# Altium PCB ratopus.PcbDoc (part 3 of 3)
Units mm, origin at the board's own origin, x right, y up, seen from the top; angles counter-clockwise.
Board outline 160 x 100 mm, 2 copper layers (Top Layer, Bottom Layer); 132 components, 69 nets, 422 pads, 0 vias.
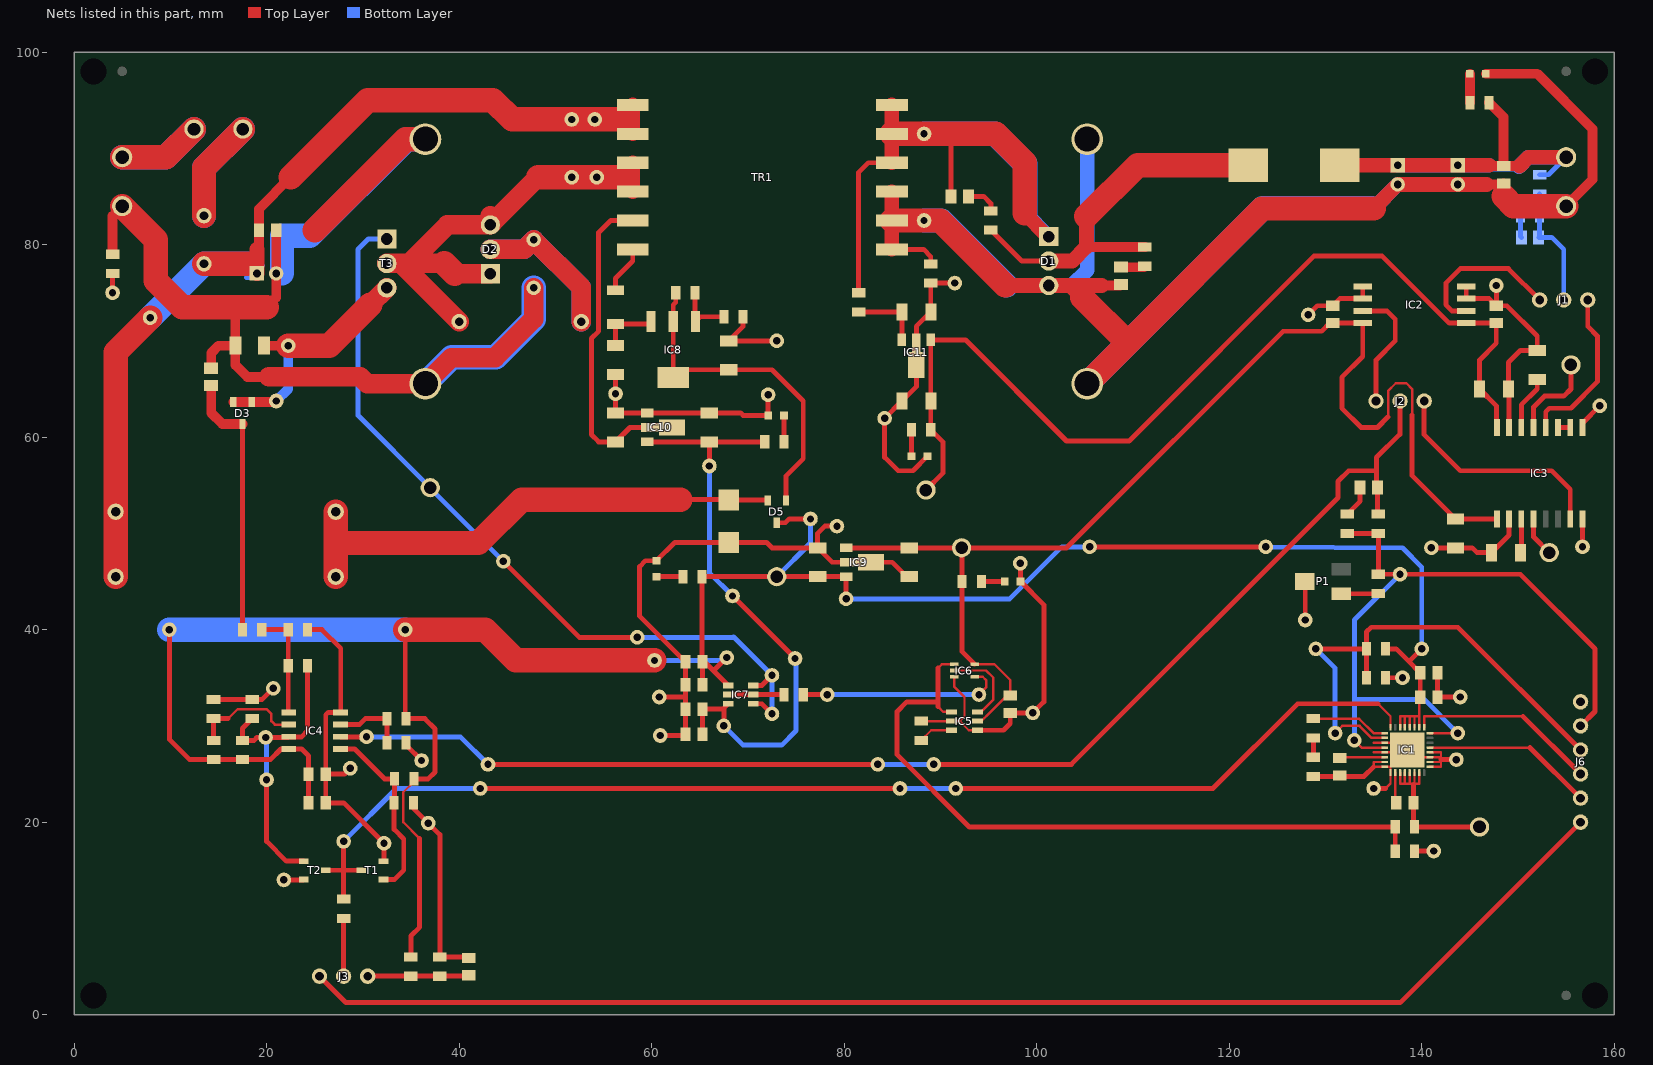
[diagram p2: the nets of this part, all layers, seen from the top]

## Part data (continued)
R39: library part R0805_1K_1%_0.125W_100PPM, "Resistor - 1%", Case=0805, Manufacturer=GENERIC, Manufacturer1 ComponentHeight=0.6mm, Manufacturer1 Example="NIC COMPONENT", Manufacturer1 Part Number=NRC10F1001TRF, Power=0.125W, Tolerance=±1%, Author="CERN DEM JLC", Component Type=Standard, CreateDate=03/12/2007, HelpURL=\\cern.ch\dfs\Applications\Altium\Datasheets\R0805_NIC_NRC.pdf, LatestRevisionDate=13/03/2008, Manufacturer Part Number=R0805_1K_1%_0.125W_100PPM, Mounted=Yes, Part Description="General Purpose Thick Film Chip Resistor", Part Number=R0805_1K_1%_0.125W_100PPM, Pin Count=2, PressFit=No, Sense=No, SMD=Yes, Socket=No, Status=Preferred, TC=±100ppm/°C
R41: library part R0805_100R_1%_0.125W_100PPM, "Resistor - 1%", Case=0805, Manufacturer=GENERIC, Manufacturer1 ComponentHeight=0.6mm, Manufacturer1 Example="NIC COMPONENT", Manufacturer1 Part Number=NRC10F4700TRF, Power=0.125W, Tolerance=±1%, Author="CERN DEM JLC", Component Type=Standard, CreateDate=03/12/2007, HelpURL=\\cern.ch\dfs\Applications\Altium\Datasheets\R0805_NIC_NRC.pdf, LatestRevisionDate=13/03/2008, Manufacturer Part Number=R0805_100R_1%_0.125W_100PPM, Mounted=Yes, Part Description="General Purpose Thick Film Chip Resistor", Part Number=R0805_100R_1%_0.125W_100PPM, Pin Count=2, PressFit=No, Sense=No, SMD=Yes, Socket=No, Status=Preferred, TC=±100ppm/°C
RT1: library part THERM_NTC_10R_TDK_B57236S0100M000, "Thermistor NTC (Negative Temperature Coefficient)", Manufacturer=TDK, Manufacturer Part Number=B57236S0100M000, Power=3.5A, Tolerance=±20%, Voltage=230VAC, Author="CERN DEM JLC", ComponentHeight=16mm, Component Type=Standard, CreateDate=12/09/2018, HelpURL=\\cern.ch\dfs\Applications\Altium\Datasheets\THERM_NTC_TDK_B57236S0100M000.pdf, LatestRevisionDate=12/09/2018, Mounted=Yes, Part Description="Radial Leaded NTC Thermistor For Inrush Current Limiting", Part Number=THERM_NTC_10R_TDK_B57236S0100M000, Pin Count=2, Sense=No, SMD=No, Socket=No, Status=None
T1 T2: "N-CHANNEL MOSFET WITH DIODE", Case=SOT23-3, Manufacturer=NEXPERIA, Author="CERN DEM JLC", Bonding=No, ComponentHeight=1.1mm, Component Type=Standard, CreateDate=16/03/2010, Device=BSH103, HelpURL=\\cern.ch\dfs\Applications\Altium\Datasheets\BSH103.pdf, LatestRevisionDate=20/06/2017, Manufacturer Part Number=BSH103, Mounted=Yes, PackageDescription="SOT23, 3 pin, Pitch 0.95mm - 1.3mm W X 2.9mm L X 1.1mm H, IPC Medium Density", Part Description="30V 850mA N-Channel Enhancement Mode Field-Effect Transistor", Part Number=BSH103, Pin Count=3, PressFit=No, Sense=No, SMD=Yes, Socket=No
T3: library part IRF630PBF_v, "N-CHANNEL MOSFET WITH DIODE", Case=TO-220, Manufacturer="VISHAY SILICONIX", Part Number=IRF634_v, Author="CERN DEM JLC", Bonding=No, ComponentHeight=19.3mm, Component Type=Standard, CreateDate=19/06/2017, Device=IRF634, HelpURL=\\cern.ch\dfs\Applications\Altium\Datasheets\IRF630PBF.pdf, LatestRevisionDate=19/06/2017, Manufacturer Part Number=IRF634, Mounted=Yes, PackageDescription="TO-220 3-Terminal - Vertical", Part Description="200V 9A N-Channel Power MOSFET", Pin Count=3, PressFit=No, Sense=No, SMD=No, Socket=No
TP1 TP2 TP3 TP4 TP5 TP6 TP7: library part VERO_20-2136, Manufacturer="VERO TECHNOLOGIES", Manufacturer Part Number=20-2136, Author="CERN DEM JLC", ComponentHeight=5.3mm, Component Type=Standard, CreateDate=21/07/2008, Family="Test Point", HelpURL=\\cern.ch\dfs\Applications\Altium\Datasheets\VERO_20-2136.pdf, LatestRevisionDate=15/07/2013, Mounted=Yes, Part Description="Black Bead PCB Terminal Test Pin for 1.6mm PCB Thickness (1.32mm Hole)", Part Number=VERO_20-2136, Pin Count=1, PressFit=No, Sense=No, SMD=No, Socket=No, Status=None
TR1: library part XFMR_COILCRAFT_POE600F-12L, "60W PoE Transformer", Manufacturer=COILCRAFT, Manufacturer Part Number=POE600F-12L, Author="CERN DEM JLC", ComponentHeight=11.43mm, Component Type=Standard, CreateDate=04/03/2019, HelpURL=\\cern.ch\dfs\Applications\Altium\Datasheets\XFMR_COILCRAFT_POE600F.pdf, LatestRevisionDate=04/03/2019, Mounted=Yes, Part Description="60W PoE Transformer", Part Number=XFMR_COILCRAFT_POE600F-12L, Pin Count=12, Sense=No, SMD=Yes, Socket=No, Status=None

## Free pads (board coordinates)
  round 1.524 hole 0.762: 2(21,63.75) 4(22.25,69.5) 5(56.25,64.5) 6(4,75) 6(73,70) 7(158.5,63.25) 8(147.75,75.75) 9(131,29.25) 10(133,28.5) 11(137.75,45.75) 12(129,38) 13(143.75,29.25) 14(94,33.25) 15(78.25,33.25) 16(144,33) 17(135,23.5) 18(141.25,17) 19(72.5,35.25) 20(72.5,31.25) 21(89.3,26) 22(30.385,28.865) 23(79.25,50.75) 24(21.8,14) 25(19.9,28.8) 26(32.2,17.8) 27(36.1,26.4) 28(36.8,19.9) 30(20,24.4) 31(28.7,25.6) 32(20.7,33.9) 33(9.9,40) 34(34.4,40) 35(67.8,37.1) 36(72.1,64.4) 37(91.6,23.5) 39(28,18) 40(143.6,26.5) 41(127.9,41) 42(138,35) 43(141,48.5) 44(140,38) 45(80.2,43.2) 46(98.3,46.9) 47(156.7,48.6) 48(128.2,72.7) 49(91.5,76) 50(84.2,61.95) 51(76.5,51.5) 52(67.5,30) 53(66,57) 54(54.1,93) 55(51.7,93) 56(51.7,87) 57(54.3,87) 58(88.3,91.5) 59(88.3,82.5) 60(7.9,72.4) 61(60.3,36.8) 62(60.8,33) 69(85.8,23.5) 71(42.2,23.5) 72(43,26) 73(83.5,26) 82(105.5,48.6) 83(123.8,48.6) 84(44.6,47.1) 85(58.5,39.2) 86(68.4,43.5) 87(74.9,37) 88(60.9,29) 89(99.6,31.35)

## Nets (pads, with @x,y where several pads share a name; then routed paths per layer and width w, separated by ;. In a path a pad name is that pad's centre, name@x,y a point inside that pad or via, vN(x,y) a via of type N, cw(c..) or ccw(c..) an arc to the next point about the centre after c; other vN are vias at no path point)
+5V_A: C4.2 C12.2 C15.2 C33.2 IC2.8 IC3.1 IC5.5 IC6.5 IC9.1 R36.2 TP6.1 | length 127.8
  Top Layer w0.25: IC6.5@93.55,36.4 95.6,36.4 97.25,34.75 C15.2@97.25,33.15 96.9,33.15 94.775,31.025 94.775,31.02 94.555,30.8 94.55,30.8 94.25,30.5 IC5.5@93.85,30.5 ; 136.5,62.1 136.5,64.8 137.3,65.6 138.4,65.6 139,65 139,62.3
  Top Layer w0.508: IC9.1@80.2,48.5 C33.2@86.75,48.5 TP6.1@92.2,48.5 ; IC6.5@93.55,36.4 92.25,37.7 R36.2@92.25,45 92.25,48.45 TP6.1@92.2,48.5 ; 136.5,62.1 135.4,61 133.7,61 131.7,63 131.7,66.2 133.877,68.377 IC2.8@133.877,71.845 133.872,71.85 C4.2@130.75,71.85 130.45,71.85 129.6,71 125.6,71 103.1,48.5 TP6.1@92.2,48.5 ; 139,62.3 139,56 C12.2@143.5,51.5 IC3.1@147.805,51.5
+5V_B: C6.2 C9.2 C36.2 IC2.1 IC3.16 IC11.1 R41.2 TP7.1 | length 103.1
  Top Layer w0.508: TP7.1@88.5,54.5 90.25,56.25 90.25,59.5 R41.2@89,60.75 C36.2@89,63.75 IC11.1@89,70.1 92.6,70.1 103.1,59.6 109.6,59.6 128.8,78.8 135.9,78.8 142.855,71.845 IC2.1@144.622,71.845 147.745,71.845 147.745,69.745 146,68 C9.2@146,65 147.75,63.25 147.75,61.055 IC3.16@147.805,61
+10V_A: C1.2 C2.2 C13.2 C14.2 C16.2 C17.2 C32.2 D5.3 IC1.26 IC1.27 IC1.28 IC1.29 IC1.30 IC4.8 IC7.1 IC9.3 pad.33 pad.34 pad.35 pad.44 pad.45 pad.51 pad.61 pad.82 pad.83 R1.2 R12.2 R13.2 R14.2 R15.2 R24.2 R35.2 TP5.1 | length 266.9
  Top Layer w0.25: R14.2@35.3,24.5 35.3,24.2 34.2,23.1 34.2,20 35.9,18.3 ; IC1.30@137.75,29.85 137.75,31 138.25,31 ; IC1.29@138.25,29.85 138.25,31 ; IC1.28@138.75,29.85 138.75,31 ; IC1.27@139.25,29.85 139.25,31 ; IC1.26@139.75,29.85 139.75,31 ; C2.2@139.85,33 139.75,32.9 139.75,31 ; 138.25,31 138.75,31 ; 138.75,31 139.25,31 ; 139.25,31 139.75,31
  Top Layer w0.508: pad.33@9.9,40 9.9,28.6 12,26.5 R12.2@14.5,26.5 R13.2@17.5,26.5 20.4,26.5 21.495,27.595 IC4.8@22.3,27.595 23.655,27.595 24.35,26.9 C13.2@24.35,25 C14.2@24.35,22 ; pad.34@34.4,40 34.4,30.85 R15.2@34.5,30.75 36.45,30.75 37.5,29.7 37.5,25.2 36.8,24.5 R14.2@35.3,24.5 ; R24.2@35,6 35,8.2 35.9,9.1 35.9,18.3 ; C17.2@65.3,34.25 C16.2@65.3,36.65 ; pad.35@67.8,37.1 66.425,35.725 ; IC7.1@67.95,34.2 66.425,35.725 ; D5.3@73,51.1 73.9,51.1 74.3,51.5 pad.51@76.5,51.5 ; pad.45@80.2,43.2 IC9.3@80.2,45.5 C32.2@77.25,45.5 TP5.1@73,45.5 R35.2@65.25,45.5 65.25,36.7 C16.2@65.3,36.65 ; pad.82@105.5,48.6 pad.83@123.8,48.6 ; R1.2@136.25,38 137.35,38 138.6,36.75 ; C2.2@139.85,33 C1.2@139.85,35.5 138.6,36.75 ; pad.44@140,38 138.75,36.75 138.6,36.75 ; C16.2@65.3,36.65 65.5,36.65 66.425,35.725
  Top Layer w2.54: pad.34@34.4,40 42.7,40 45.9,36.8 pad.61@60.3,36.8
  Bottom Layer w0.508: pad.61@60.3,36.8 67.5,36.8 pad.35@67.8,37.1 ; TP5.1@73,45.5 76.5,49 pad.51@76.5,51.5 ; pad.45@80.2,43.2 97.2,43.2 102.6,48.6 pad.82@105.5,48.6 ; pad.83@123.8,48.6 138,48.5 140,46.5 pad.44@140,38
  Bottom Layer w2.54: pad.33@9.9,40 pad.34@34.4,40
-5V_A: C19.2 C20.2 C35.2 IC7.3 IC10.3 pad.52 pad.53 pad.86 pad.87 R40.2 | length 62.2
  Top Layer w0.508: IC10.3@59.535,59.5 C35.2@66,59.5 ; C20.2@65.3,29.15 C19.2@65.3,31.75 67.4,31.75 67.5,31.85 ; pad.53@66,57 C35.2@66,59.5 ; pad.52@67.5,30 67.5,31.85 ; IC7.3@67.95,32.3 67.5,31.85 ; pad.86@68.4,43.5 pad.87@74.9,37 ; R40.2@71.75,59.5 C35.2@66,59.5
  Bottom Layer w0.508: pad.53@66,57 66,45.9 pad.86@68.4,43.5 ; pad.52@67.5,30 69.5,28 73.5,28 75,29.5 pad.87@75,37
aux_n: C34.1 IC10.2 TR1.5 | length 34.7
  Top Layer w0.508: TR1.5@58.04,82.5 55.75,82.5 54.5,81.25 54.5,71 53.75,70.25 53.75,60.25 54.5,59.5 C34.1@56.25,59.5 57.75,61 IC10.2@59.835,61 IC10.2@62.135,61
aux_p: D4.2 TR1.6 | length 5
  Top Layer w0.508: D4.2@56.25,75.25 56.25,76.5 58.04,78.29 TR1.6@58.04,79.5
en: IC1.32 pad.37 pad.39 pad.69 pad.71 R26.2 T1.3 T2.3 | length 126
  Top Layer w0.25: 135.45,32.3 136.75,31 IC1.32@136.75,29.85
  Top Layer w0.504: 94.6,23.5 118.3,23.5 127.1,32.3 135.45,32.3
  Top Layer w0.508: T2.3@26.15,15 28,15 ; R26.2@28,12 28,15 ; pad.39@28,18 28,15 ; T1.3@29.85,15 28,15 ; pad.71@42.2,23.5 pad.69@85.8,23.5 ; pad.37@91.6,23.5 94.6,23.5
  Bottom Layer w0.508: pad.39@28,18 33.5,23.5 pad.71@42.2,23.5 ; pad.69@85.8,23.5 pad.37@91.5,23.5
gate: IC7.4 IC7.6 pad.19 pad.20 pad.84 pad.85 T3.1 TP4.1 | length 83.7
  Top Layer w0.508: pad.84@44.6,47.1 52.5,39.2 pad.85@58.5,39.2 ; IC7.4@70.55,32.3 71.45,32.3 pad.20@72.5,31.25 ; IC7.6@70.55,34.2 71.45,34.2 pad.19@72.5,35.25
  Bottom Layer w0.508: T3.1@32.5,80.58 30.58,80.58 29.5,79.5 29.5,62.25 TP4.1@37,54.75 37,54.7 pad.84@44.6,47.1 ; pad.85@58.5,39.2 68.45,39.2 68.5,39.25 pad.19@72.5,35.25 pad.20@72.5,31.25
GND_A: C1.1 C2.1 C4.1 C7.1 C10.1 C12.1 C13.1 C14.1 C15.1 C16.1 C17.1 C18.1 C19.1 C20.1 C30.1 C31.1 C32.1 C33.1 C34.2 C35.1 D6.2 IC1.3 IC1.5 IC1.7 IC1.8 IC1.9 IC1.17 IC1.18 IC1.19 IC1.20 IC1.33 IC2.5 IC2.6 IC3.2 IC3.8 IC4.4 IC5.2 IC5.4 IC6.3 IC9.2 IC10.1 J6.6 LD2.1 LD3.1 LD4.2 P1.2 pad.5 pad.6 pad.16 pad.17 pad.18 pad.23 pad.24 pad.26 pad.27 pad.28 pad.31 pad.32 pad.36 pad.40 pad.41 pad.42 pad.43 pad.46 pad.47 pad.48 pad.62 pad.88 pad.89 R2.1 R7.1 R9.1 R17.1 R19.1 R20.1 R21.1 R22.1 R23.1 R27.1 R37.1 R42.1 T1.2 T2.2 | length 258.1
  Top Layer w0.25: R17.1@88,30.5 IC5.2@91.15,30.5 92,30.5 ; IC6.3@91.45,35.1 91.45,34.05 92.5,33 92.5,31 92,30.5 ; IC5.4@93.85,29.55 92.95,29.55 92,30.5 ; C7.1@131.5,24.85 C7.1@131.6,24.75 ; 135,27.25 IC1.5@136.15,27.25 138.25,27.25 IC1.33@138.5,27.5 ; 135,28.25 IC1.3@136.15,28.25 137.75,28.25 IC1.33@138.5,27.5 ; IC1.7@136.15,26.25 135,26.25 135,25.75 IC1.8@136.15,25.75 136.75,25.75 IC1.9@136.75,25.15 136.75,24 136.25,23.5 ; IC1.17@140.85,25.75 142,25.75 142,26.25 ; IC1.18@140.85,26.25 142,26.25 ; IC1.20@140.85,27.25 142,27.25 142,26.75 ; IC1.33@138.5,27.5 139.25,26.75 IC1.19@140.85,26.75 142,26.75 ; 142,26.25 142,26.5 142,26.75
  Top Layer w0.508: pad.6@4,75 R42.1@4,77 ; R20.1@14.5,32.75 R19.1@18.5,32.75 19.55,32.75 pad.32@20.7,33.9 ; pad.24@21.8,14 23.8,14 T2.2@23.85,14.05 ; R21.1@24.25,40 25.75,40 27.7,38.05 IC4.4@27.7,31.405 26.405,31.405 26.15,31.15 C13.1@26.15,25 ; pad.31@28.7,25.6 28.1,25 C13.1@26.15,25 ; T1.2@32.15,15.95 32.2,16 pad.26@32.2,17.8 28,22 C14.1@26.15,22 C13.1@26.15,25 ; R22.1@34.5,28.25 34.5,28 pad.27@36.1,26.4 ; R23.1@35.25,22 35.25,21.45 pad.28@36.8,19.9 38,18.7 R27.1@38,6 40.9,6 C18.1@41,5.9 ; C30.1@56.25,66.5 pad.5@56.25,64.5 C34.2@56.25,62.5 IC10.1@59.535,62.5 C35.1@66,62.5 69.25,62.5 69.5,62.25 LD4.2@72.1,62.25 pad.36@72.1,64.4 ; pad.62@60.8,33 63.5,33 ; pad.88@60.9,29 63.35,29 C20.1@63.5,29.15 C19.1@63.5,31.75 63.5,33 ; R37.1@69.5,72.5 69.5,71.5 C31.1@68,70 pad.6@73,70 ; pad.23@79.25,50.75 78,50.75 77.25,50 C32.1@77.25,48.5 ; C33.1@86.75,45.5 86.5,45.5 85,47 IC9.2@82.8,47 IC9.2@80.5,47 78.75,47 C32.1@77.25,48.5 ; IC5.4@93.85,29.55 96.55,29.55 97.25,30.25 C15.1@97.25,31.35 pad.89@99.6,31.35 100.75,32.5 100.75,42.575 LD3.1@98.325,45 98.325,46.875 pad.46@98.3,46.9 ; P1.2@127.85,45 127.9,44.95 pad.41@127.9,41 ; pad.48@128.2,72.7 129.15,73.65 C4.1@130.75,73.65 131.485,74.385 IC2.6@133.877,74.385 IC2.5@133.877,75.655 ; R7.1@128.75,24.75 131.4,24.75 C7.1@131.5,24.85 ; C7.1@131.6,24.75 134,24.75 135,25.75 ; pad.17@135,23.5 136.25,23.5 ; R2.1@136.25,35 pad.42@138,35 ; R9.1@139.25,17 pad.18@141.25,17 ; pad.43@141,48.5 C12.1@143.5,48.5 145.25,48.5 145.75,48 C10.1@147.25,48 149.075,49.825 IC3.2@149.075,51.5 ; C1.1@141.65,35.5 C2.1@141.65,33 pad.16@144,33 ; 142,26.5 pad.40@143.6,26.5 ; IC3.8@156.695,51.5 156.695,48.605 pad.47@156.7,48.6 ; 63.5,33 C17.1@63.5,34.25 C16.1@63.5,36.65 58.75,41.4 58.75,46.55 59.35,47.15 LD2.1@60.5,47.15 62.4,49.05 D6.2@68,49.05 71.95,49.05 72.5,48.5 C32.1@77.25,48.5
GND_B: C5.1 C6.1 C9.1 C11.1 C36.1 C37.1 IC2.3 IC2.4 IC3.9 IC3.15 IC11.2 LD5.1 pad.7 pad.8 pad.49 pad.50 R5.1 R32.1 | length 57.7
  Top Layer w0.508: LD5.1@88.65,58 87.15,56.5 85.6,56.5 84.2,57.9 pad.50@84.2,61.95 C36.1@86,63.75 87.5,65.25 IC11.2@87.5,67.5 IC11.2@87.5,69.8 87.5,71.5 C37.1@89,73 R32.1@89,76 pad.49@91.5,76 ; IC2.4@144.622,75.655 IC2.3@144.622,74.385 147.015,74.385 C6.1@147.75,73.65 ; pad.8@147.75,75.75 C6.1@147.75,73.65 ; IC3.15@149.075,61 149.075,64.925 C9.1@149,65 149,67.75 150.25,69 C11.1@152,69 152,70.5 148.85,73.65 C6.1@147.75,73.65 ; IC3.9@156.695,61 156.695,61.445 pad.7@158.5,63.25
  Bottom Layer w0.508: R5.1@150.25,83 150.25,80.85 C5.1@150.35,80.75
GND_I: C26.2 C27.1 C28.1 C29.1 HS1.1 HS1.2 J4.1 R33.1 R42.2 | length 139.6
  Top Layer w0.508: 4,83 J4.1@5,84
  Top Layer w1: R42.2@4,79 4,83
  Top Layer w1.016: C29.1@14.25,67.15 14.25,68.75 15,69.5 R33.1@16.75,69.5 ; 16.75,73.5 R33.1@16.75,69.5 ; 20,73.5 21,74.5 C26.2@21,77 C27.1@21,81.5 ; 20.25,66.25 18,66.25 16.75,67.5 R33.1@16.75,69.5
  Top Layer w2.032: 20.25,66.25 29.75,66.25 30.45,65.55 HS1.1@36.5,65.55 39.2,68.25 43.75,68.25 47.75,72.25 C28.1@47.75,75.5
  Top Layer w2.54: J4.1@5,84 8.5,80.5 8.5,76.25 11.25,73.5 16.75,73.5 18.25,73.5 20,73.5 ; 25,81.5 34.45,90.95 HS1.2@36.5,90.95
  Bottom Layer w2.54: C26.2@21.6,77 21.6,80.9 24.5,80.9 34.55,90.95 HS1.2@36.5,90.95 ; HS1.1@36.5,65.55 39.25,68.3 43.8,68.3 47.75,72.25 C28.1@47.75,75.5
GND_O: C22.2 C23.2 C24.1 C25.1 D1.3 HS2.1 HS2.2 J5.2 LD1.1 pad.59 R32.2 TR1.7 TR1.8 TR1.9 | length 210
  Top Layer w0.508: TR1.7@84.96,79.5 88.25,79.5 89,78.75 R32.2@89,78 ; C25.1@108.65,75.75 C25.1@108.75,75.85 ; C24.1@148.4,86.25 C24.1@148.5,86.35
  Top Layer w1.016: 106.75,75.75 C25.1@108.65,75.75 ; LD1.1@146.65,97.75 152,97.75 157.75,92 157.75,86.75 J5.2@155,84 ; 146.75,86.25 C24.1@148.4,86.25 ; 148.5,85 C24.1@148.5,86.35
  Top Layer w1.524: TR1.7@84.96,79.5 TR1.8@84.96,82.5 TR1.9@84.96,85.5 ; 96.75,75.75 D1.3@101.25,75.75 103.5,75.75 106.75,75.75
  Top Layer w1.54: 103.5,75.75 104.75,74.5 ; 135,83.75 C22.2@137.5,86.25 C23.2@143.75,86.25 146.75,86.25
  Top Layer w2.54: TR1.8@84.96,82.5 pad.59@88.3,82.5 90,82.5 96.75,75.75 ; 104.75,74.5 109.45,69.8 109.5,69.8 ; HS2.1@105.25,65.55 109.5,69.8 ; 135,83.75 123.45,83.75 109.5,69.8 ; 148.5,85 149.5,84 J5.2@155,84
  Bottom Layer w0.508: 134.8,83.8 135.05,83.8
  Bottom Layer w1.524: 103.65,75.75 105.25,77.35 HS2.2@105.25,90.95
  Bottom Layer w1.54: 135.05,83.8 C22.2@137.5,86.25 C23.2@143.75,86.25
  Bottom Layer w1.6: 96.85,75.75 D1.3@101.25,75.75 103.65,75.75
  Bottom Layer w2.54: pad.59@88.3,82.5 90.1,82.5 96.85,75.75 ; HS2.1@105.25,65.55 123.5,83.8 134.8,83.8
Ipk_sns: C29.2 D3.3 R16.1 | length 27.9
  Top Layer w0.508: R16.1@17.5,40 D3.3@17.5,61.35
  Top Layer w1.016: C29.2@14.25,65.35 14.25,62.5 15.4,61.35 D3.3@17.5,61.35
NetC3_2: C3.2 IC1.10 | length 3.2
  Top Layer w0.25: IC1.10@137.25,25.15 137.25,22.1 C3.2@137.35,22
NetC5_2: C5.2 J1.2 R3.1 R5.2 | length 12.9
  Bottom Layer w0.508: R3.1@152.25,85.25 R5.2@152.25,83 152.25,80.85 C5.2@152.15,80.75 153.5,80.75 154.75,79.5 J1.2@154.75,74.25
NetC7_2: C7.2 IC1.6 | length 4.7
  Top Layer w0.25: C7.2@131.5,26.65 131.6,26.75 IC1.6@136.15,26.75
NetC8_1: C8.1 R10.2 | length 3.3
  Top Layer w0.508: R10.2@132.25,52 133.6,53.35 C8.1@133.6,54.75
NetC10_2: C10.2 IC3.3 | length 3.5
  Top Layer w0.508: C10.2@150.25,48 150.345,48.095 IC3.3@150.345,51.5
NetC11_2: C11.2 IC3.14 | length 5.7
  Top Layer w0.508: IC3.14@150.345,61 150.345,63.345 152,65 C11.2@152,66
NetC18_2: C18.2 J3.1 R24.1 R27.2 | length 10.5
  Top Layer w0.508: J3.1@30.5,4 R24.1@35,4 R27.2@38,4 40.9,4 C18.2@41,4.1
NetC21_2: C21.2 R28.1 | length 3.4
  Top Layer w0.508: C21.2@92.9,85 94.5,85 95.25,84.25 R28.1@95.25,83.5
NetC25_2: C25.2 R29.1 | length 2.5
  Top Layer w0.508: R29.1@111.15,77.65 R29.1@111.25,77.75
  Top Layer w1.016: C25.2@108.75,77.65 R29.1@111.15,77.65
NetC28_2: C28.2 D2.2 R31.2 | length 30.9
  Top Layer w2.032: D2.2@43.25,79.5 46.75,79.5 C28.2@47.75,80.5 52.7,75.55 R31.2@52.7,72
  Bottom Layer w2.032: D2.2@43.25,79.5 46.75,79.5 C28.2@47.75,80.5 52.7,75.55 R31.2@52.7,72
NetC30_2: C30.2 D4.1 IC8.3 | length 6.1
  Top Layer w0.508: C30.2@56.25,69.5 D4.1@56.25,71.75 59.7,71.75 IC8.3@59.95,72
NetC31_2: C31.2 D5.1 IC8.2 IC8.4 R34.2 | length 35.2
  Top Layer w0.508: R34.2@62.5,75 62.5,74 62.25,73.75 IC8.2@62.25,72 IC8.4@62.25,66.2 63.05,67 C31.2@68,67 72.5,67 75.75,63.75 75.75,57.75 73.95,55.95 D5.1@73.95,53.4
NetC37_2: C37.2 IC11.3 R39.2 | length 7.4
  Top Layer w0.508: R39.2@81.5,73 C37.2@86,73 IC11.3@86,70.1
NetD1_2: D1.2 L1.1 R28.2 R29.2 | length 40.1
  Top Layer w0.508: R28.2@95.25,81.5 98.46,78.29 D1.2@101.25,78.29
  Top Layer w1.016: 105.17,79.75 R29.2@111.25,79.75
  Top Layer w1.524: D1.2@101.25,78.29 103.71,78.29 105.17,79.75 105.17,82.92
  Top Layer w2.54: 105.17,82.92 110.5,88.25 L1.1@122,88.25
NetD2_1: D2.1 D2.3 pad.56 pad.57 R31.1 T3.2 TR1.3 TR1.4 | length 48.8
  Top Layer w1.524: TR1.4@58.04,85.5 TR1.3@58.04,88.5
  Top Layer w2.032: T3.2@32.5,78.04 33.96,78.04 ; 38.46,78.04 34.79,78.04 ; 39.54,76.96 D2.1@43.25,76.96 ; R31.1@40,72 33.96,78.04 ; D2.3@43.25,83 D2.3@43.25,82.04 38.79,82.04 34.79,78.04 ; D2.3@43.48,82.27 48.21,87 ; 33.96,78.04 34.79,78.04
  Top Layer w2.54: 38.46,78.04 39.54,76.96 ; 48.21,87 pad.56@51.7,87 pad.57@54.3,87 56.54,87
NetD3_1: D3.1 D3.2 pad.2 pad.4 R33.2 T3.3 | length 26
  Top Layer w0.508: pad.2@20.9,63.65 pad.2@21,63.75
  Top Layer w1.016: D3.2@16.55,63.65 D3.1@18.45,63.65 pad.2@20.9,63.65 ; R33.2@19.75,69.5 pad.4@22.25,69.5
  Top Layer w2.032: 30.75,73.75 T3.3@32.5,75.5
  Top Layer w2.54: pad.4@22.25,69.5 26.5,69.5 30.75,73.75
  Bottom Layer w1.016: pad.2@21,63.75 22.25,65 pad.4@22.25,69.5
NetD5_2: D5.2 D6.1 R38.2 R43.2 | length 53.5
  Top Layer w0.508: 63,53.5 67.95,53.5 D6.1@68,53.45 72,53.45 D5.2@72.05,53.4
  Top Layer w2.54: R38.2@27.18,45.5 27.18,49 ; R43.2@27.18,52.25 27.18,49 ; 63,53.5 46.5,53.5 42,49 27.18,49
NetFH1_1: FH1.1 J4.2 | length 17.3
  Top Layer w2.54: J4.2@5,89.08 9.54,89.08 FH1.1@12.46,92
  Bottom Layer w2.54: J4.2@5,89.08 9.54,89.08 FH1.1@12.46,92
NetFH1_2: FH1.2 RT1.1 | length 21.3
  Top Layer w2.54: RT1.1@13.5,83 13.5,87.96 FH1.2@17.54,92
  Bottom Layer w2.54: RT1.1@13.5,83 13.5,87.96 FH1.2@17.54,92
NetIC1_1: IC1.1 R8.2 | length 8
  Top Layer w0.25: R8.2@128.75,30.75 133.5,30.75 135,29.25 IC1.1@136.15,29.25
NetIC2_2: IC2.2 J1.3 | length 16.4
  Top Layer w0.508: IC2.2@144.622,73.115 143.135,73.115 142.5,73.75 142.5,76 144,77.5 149,77.5 J1.3@152.25,74.25
NetIC2_7: IC2.7 J2.3 | length 13.1
  Top Layer w0.508: IC2.7@133.877,73.115 136.385,73.115 137.25,72.25 137.25,70 135.25,68 J2.3@135.25,63.75
NetIC3_4: IC3.4 TP2.1 | length 4.2
  Top Layer w0.508: IC3.4@151.615,51.5 151.615,49.635 TP2.1@153.25,48
NetIC3_7: IC3.7 J2.1 | length 24.1
  Top Layer w0.508: J2.1@140.25,63.75 140.25,60.25 144,56.5 153.5,56.5 155.425,54.575 IC3.7@155.425,51.5
NetIC3_10: IC3.10 IC3.11 | length 1.3
  Top Layer w0.508: IC3.11@154.155,61 IC3.10@155.425,61
NetIC3_12: IC3.12 J1.1 | length 17.2
  Top Layer w0.508: IC3.12@152.885,61 152.885,62.635 153.25,63 155.5,63 158.25,65.75 158.25,70.5 157.25,71.5 J1.1@157.25,74.25
NetIC3_13: IC3.13 TP3.1 | length 9.3
  Top Layer w0.508: IC3.13@151.615,61 151.615,63.115 152.75,64.25 154.75,64.25 155.5,65 TP3.1@155.5,67.5
NetIC4_3: IC4.3 R15.1 R22.2 | length 7.6
  Top Layer w0.508: IC4.3@27.7,30.135 29.635,30.135 30.25,30.75 R15.1@32.5,30.75 R22.2@32.5,28.25
NetIC4_5: IC4.5 R16.2 R18.1 R21.2 | length 11.4
  Top Layer w0.508: R16.2@19.5,40 R21.2@22.25,40 R18.1@22.25,36.25 22.25,31.455 IC4.5@22.3,31.405
NetIC4_6: IC4.6 R12.1 R20.2 | length 11.6
  Top Layer w0.25: 16,30.75 17,31.75 20,31.75 20.5,31.25 20.5,30.5 20.865,30.135 IC4.6@22.3,30.135
  Top Layer w0.508: R12.1@14.5,28.5 R20.2@14.5,30.75 16,30.75
NetIC5_3: IC5.3 R17.2 | length 3.6
  Top Layer w0.25: R17.2@88,28.5 89.05,29.55 IC5.3@91.15,29.55
NetIC5_6: IC5.6 IC6.2 | length 8.8
  Top Layer w0.25: IC6.2@91.45,35.75 94.75,35.75 95.5,35 95.5,32.75 94.2,31.45 IC5.6@93.85,31.45
NetIC7_2: IC7.2 IC7.5 R25.2 | length 5.8
  Top Layer w0.508: IC7.2@67.95,33.25 IC7.5@70.55,33.25 R25.2@73.75,33.25
NetIC8_1: IC8.1 R34.1 R37.2 | length 6.2
  Top Layer w0.508: R34.1@64.5,75 64.5,72.05 IC8.1@64.55,72 65.05,72.5 R37.2@67.5,72.5
NetJ3_2: J3.2 R26.1 | length 6
  Top Layer w0.508: J3.2@28,4 R26.1@28,10
NetLD1_2: LD1.2 R30.1 | length 3
  Top Layer w1.016: R30.1@145,94.75 LD1.2@145,97.75
NetLD2_2: LD2.2 R35.1 | length 2.7
  Top Layer w0.508: LD2.2@60.5,45.5 R35.1@63.25,45.5
NetLD3_2: LD3.2 R36.1 | length 2.4
  Top Layer w0.508: R36.1@94.25,45 LD3.2@96.675,45
NetLD4_1: LD4.1 R40.1 | length 2.7
  Top Layer w0.508: R40.1@73.75,59.5 LD4.1@73.75,62.25
NetLD5_2: LD5.2 R41.1 | length 2.8
  Top Layer w0.508: LD5.2@87,58 R41.1@87,60.75
NetP1_1: P1.1 R11.2 | length 3.9
  Top Layer w0.508: P1.1@131.65,43.73 135.48,43.73 R11.2@135.5,43.75
NetR7_2: R7.2 R8.1 | length 2
  Top Layer w0.508: R7.2@128.75,26.75 R8.1@128.75,28.75
ocp: IC4.7 pad.25 pad.30 R13.1 R18.2 R19.2 T2.1 | length 32.1
  Top Layer w0.508: R19.2@18.5,30.75 17.5,29.75 R13.1@17.5,28.5 18.7,28.5 19,28.8 pad.25@19.9,28.8 22.235,28.8 IC4.7@22.3,28.865 23.635,28.865 24.25,29.48 R18.2@24.25,36.25 ; pad.30@20,24.4 20,18 22.05,15.95 T2.1@23.85,15.95
  Bottom Layer w0.508: pad.25@19.9,28.8 20,28.7 pad.30@20,24.4
ovp: IC4.1 R14.1 R23.2 T1.1 | length 19.3
  Top Layer w0.508: IC4.1@27.7,27.595 29.155,27.595 32.25,24.5 R14.1@33.3,24.5 33.3,22.05 R23.2@33.25,22 33.25,19.25 34.25,18.25 34.25,15 33.3,14.05 T1.1@32.15,14.05
pgood: IC1.2 J6.4 pad.9 pad.12 R1.1 R2.2 | length 53.3
  Top Layer w0.25: pad.9@131,29.25 131.75,30 133.543,30 134.793,28.75 IC1.2@136.15,28.75
  Top Layer w0.508: pad.12@129,38 R1.1@134.25,38 ; R2.2@134.25,35 R1.1@134.25,38 ; J6.4@156.5,27.5 143.75,40.25 134.75,40.25 134.25,39.75 R1.1@134.25,38
  Bottom Layer w0.508: pad.12@129,38 131,36 pad.9@131,29.25
ps_on: J3.3 J6.1 | length 139.9
  Top Layer w0.508: J3.3@25.5,4 28.25,1.25 137.75,1.25 J6.1@156.5,20
ptat: IC1.25 J6.3 | length 19.9
  Top Layer w0.25: IC1.25@140.25,29.85 140.25,31 150.5,31
  Top Layer w0.508: 150.5,31 J6.3@156.5,25
pwm_5V: IC5.1 IC6.1 R4.2 R9.2 | length 74
  Top Layer w0.25: 89.75,32 90.3,31.45 IC5.1@91.15,31.45 ; 89.75,36 90.15,36.4 IC6.1@91.45,36.4
  Top Layer w0.508: 89.75,32 89.75,32.5 ; 89.75,36 89.75,32.5 ; R9.2@137.25,17 R4.2@137.25,19.5 93,19.5 85.5,27 85.5,31.5 86.5,32.5 89.75,32.5
pwm_10V: C3.1 IC1.11 IC1.12 IC1.13 IC1.14 IC1.15 R4.1 TP1.1 | length 19.1
  Top Layer w0.25: IC1.11@137.75,25.15 137.75,24 138.25,24 ; IC1.12@138.25,25.15 138.25,24 ; IC1.13@138.75,25.15 138.75,24 ; 139.15,23.9 139.25,24 ; IC1.14@139.25,25.15 139.25,24 ; IC1.15@139.75,25.15 139.75,24 139.25,24 ; 138.25,24 138.75,24 ; 138.75,24 139.25,24
  Top Layer w0.508: 139.15,23.9 C3.1@139.15,22 139.15,19.6 R4.1@139.25,19.5 TP1.1@146,19.5
pwm_dl: IC6.4 pad.14 pad.15 R25.1 | length 21.4
  Top Layer w0.25: IC6.4@93.55,35.1 94.4,35.1 94.75,34.75 94.75,34 pad.14@94,33.25
  Top Layer w0.508: R25.1@75.75,33.25 pad.15@78.25,33.25
  Bottom Layer w0.508: pad.15@78.25,33.25 pad.14@94,33.25
sec_p: C21.1 D1.1 pad.58 R39.1 TR1.10 TR1.11 TR1.12 | length 73.5
  Top Layer w0.508: R39.1@81.5,75 81.5,87.5 82.5,88.5 TR1.10@84.96,88.5 ; 90,91.5 91.1,90.4 C21.1@91.1,85
  Top Layer w1.524: TR1.10@84.96,88.5 TR1.11@84.96,91.5 TR1.12@84.96,94.5 ; 98.75,83.25 101.17,80.83 D1.1@101.25,80.83
  Top Layer w2.54: TR1.11@84.96,91.5 pad.58@88.3,91.5 90,91.5 95.75,91.5 98.75,88.5 98.75,83.25
  Bottom Layer w1.524: 98.8,83.28 D1.1@101.25,80.83
  Bottom Layer w2.54: pad.58@88.3,91.5 95.7,91.5 98.8,88.4 98.8,83.28
vi: IC1.4 IC1.24 J6.5 pad.10 pad.11 pad.13 R6.1 R10.1 R11.1 | length 79.6
  Top Layer w0.25: pad.10@133,28.5 133.75,27.75 IC1.4@136.15,27.75 ; IC1.24@140.85,29.25 pad.13@143.75,29.25
  Top Layer w0.508: R10.1@132.25,50 R6.1@135.5,50 R11.1@135.5,45.75 pad.11@137.75,45.75 150.25,45.75 158,38 158,31.5 J6.5@156.5,30
  Bottom Layer w0.508: pad.10@133,28.5 133,32.75 ; pad.11@137.75,45.75 133,41 133,32.75 ; pad.13@143.75,29.25 140.25,32.75 133,32.75
VIN: C26.1 C27.2 pad.54 pad.55 pad.60 R38.1 R43.1 RT1.2 TR1.1 TR1.2 | length 103.3
  Top Layer w1.016: 18,78 C26.1@19,77 ; 19,79.5 19.2,79.7 C27.2@19.2,81.5 19.2,83.7 22.5,87
  Top Layer w1.524: C26.1@19,77 19,79.5 ; TR1.2@58.04,91.5 TR1.1@58.04,94.5
  Top Layer w2.54: R38.1@4.32,45.5 R43.1@4.32,52.25 4.32,68.82 pad.60@7.9,72.4 ; RT1.2@13.5,78 18,78 ; 22.5,87 30.5,95 43.5,95 45.5,93 pad.55@51.7,93 pad.54@54.1,93 56.54,93
  Bottom Layer w0.508: 17.9,76.6 18.6,76.6 C26.1@19,77 19,77.2 19.6,77.8 19.4,78 18,78
  Bottom Layer w2.54: pad.60@7.9,72.4 RT1.2@13.5,78 18,78
vo_sns: C8.2 IC4.2 J2.2 pad.21 pad.22 pad.72 pad.73 R6.2 | length 135.3
  Top Layer w0.508: IC4.2@27.7,28.865 pad.22@30.385,28.865 ; pad.72@43,26 pad.73@83.5,26 ; pad.21@89.3,26 103.6,26 131.3,53.7 131.3,55.4 132.4,56.5 135.3,56.5 ; R6.2@135.5,52 135.4,52.1 C8.2@135.4,54.75 135.3,54.85 135.3,56.5 ; J2.2@137.75,63.75 137.75,60.25 137.65,60.25 135.3,57.9 135.3,56.5
  Bottom Layer w0.508: pad.22@30.385,28.865 40.135,28.865 pad.72@43,26 ; pad.73@83.5,26 pad.21@89.3,26
VOUT: C22.1 C23.1 C24.2 J5.1 L1.2 R3.2 R30.2 | length 52.6
  Top Layer w1.016: 147,88.25 147.1,88.15 C24.2@148.5,88.15 ; R30.2@147,94.75 148.5,93.25 C24.2@148.5,88.15 ; 150.15,88.15 C24.2@148.5,88.15
  Top Layer w1.524: L1.2@131.5,88.25 C22.1@137.5,88.25 C23.1@143.75,88.25 147,88.25
  Top Layer w1.54: 150.15,88.15 151.08,89.08 J5.1@155,89.08
  Bottom Layer w0.508: 146.95,88.25 147.1,88.1 ; R3.2@152.25,87.25 153.17,87.25 J5.1@155,89.08
  Bottom Layer w1.016: 147.1,88.1 150.1,88.1
  Bottom Layer w1.524: C22.1@137.5,88.25 C23.1@143.75,88.25 146.95,88.25
  Bottom Layer w1.54: 150.1,88.1 151.08,89.08 J5.1@155,89.08
vref: IC1.21 J6.2 | length 17.8
  Top Layer w0.25: IC1.21@140.85,27.75 151.25,27.75
  Top Layer w0.508: 151.25,27.75 J6.2@156.5,22.5
pads on no net: B1.1 B2.1 B3.1 B4.1 FTG1.FTG2 FTG2.FTG2 FTG3.FTG2 IC1.16 IC1.22 IC1.23 IC1.31 IC3.5 IC3.6 P1.3
copper on no net: | length 4.6
  Top Layer w0.25: 137.25,29.85 137.25,31 ; 140.25,24 140.25,25.15 ; 140.85,28.25 142,28.25 ; 140.85,28.75 142,28.75

## Polygon pours and split planes (outlines as drawn)
GND_I on Top Layer "Top Layer-GND_I" (solid, pour order 32): 5.9,82.9 5.9,81.7 6,81.6 3.6,81.6 3.6,82.8 3.7,82.9
GND_O on Top Layer "Top Layer-GND_O" (solid, pour order 20): 147.75,84 146.25,85.5 146.25,86 148,86 148.25,85.75 148.25,84 148,83.75 147.75,84
VIN on Top Layer "Top Layer-VIN" (solid, pour order 2): 42.5,97.5 30.5,97.5 19.5,86.5 19.5,84.25 24,84.25 33,93.25 42.5,93.25
GND_I on Top Layer "Top Layer-GND_I" (solid, pour order 4): 20.75,80 25.25,80 26.25,81 24.5,82.75 24,82.25 20.75,82.25
VIN on Top Layer "Top Layer-VIN" (solid, pour order 0): 55.5,95 55.5,91 44.75,91 42.5,93.25 42.5,97.5 44.5,97.5 47,95
NetD2_1 on Top Layer "Top Layer-NetD2_1" (solid, pour order 8): 55.5,89 55.5,85 45.75,85 45.75,88.25 46.5,89
NetD2_1 on Top Layer "Top Layer-NetD2_1" (solid, pour order 10): 46.5,89 44.25,89 34.25,79 34.25,78.5 35.5,77.25 41,82.75 42.75,82.75 47.25,87.25 47.25,88.25
NetD2_1 on Top Layer "Top Layer-NetD2_1" (solid, pour order 12): 44.25,89 38.75,89 35,85.25 35,76 37.25,76 44.75,83.5 44.75,88.5
NetD3_1 on Top Layer "Top Layer-NetD3_1" (solid, pour order 14): 32.5,75.5 24.75,75.5 23.75,74.5 23.75,70.5 26,68.25 29,68.25 32.5,71.75
NetD2_1 on Top Layer "Top Layer-NetD2_1" (solid, pour order 16): 36,75.5 38.75,78.25 40.25,76.75 40.25,72 38.5,72 38.5,72.25 36,74.75
GND_A on Bottom Layer "Bot Layer-GND_A" (solid, pour order 26): 0,78 10.5,78 19.3,69.2 19.3,63.2 23.6,58.9 43.4,58.9 62,77.5 76.5,77.5 76.5,61 86,51.5 106.5,51.5 131.5,76.5 138,76.5 138,69.5 141,66.5 143,64.5 143,57.5 145.5,55 160,55 160,0.5 160.5,0 0,0
GND_O on Bottom Layer "Bot Layer-GND_O" (solid, pour order 34): 104.6,76.5 109.65,71.45 107.7,69.5 102,75.2 103.3,76.5
GND_B on Bottom Layer "Bot Layer-GND_B" (solid, pour order 18): 78,77.75 92,77.75 102.75,67 102.75,63.75 104.25,62.25 106.5,62.25 126,81.75 158.5,81.75 160,80.25 160,57.5 158.75,56.25 148.5,56.25 144,60.75 144,65.75 139.5,70.25 139.5,76.25 138.25,77.5 130.75,77.5 105.75,52.5 86.5,52.5 78.75,60.25 78,61
VIN on Bottom Layer "Bot Layer-VIN" (solid, pour order 28): 17.2,86.8 17.2,76.3 19.8,76.3 19.8,83.5 20.5,84.2 24,84.2 33,93.2 42.5,93.2 44.7,91 55.5,91 56.4,91 56.4,90.8 59.7,90.8 59.7,92.2 59.7,93.8 59.7,95.2 59.6,95.1 47,95.1 47,95.2 44.5,97.7 30.6,97.7 19.7,86.8
NetD2_1 on Bottom Layer "Bot Layer-NetD2_1" (solid, pour order 30): 59.7,89.2 59.7,84.8 59.6,84.9 47.5,84.9 43.7,81.1 42.3,81.1 42.3,81 39.9,78.6 40.4,78.1 44.2,78.1 44.2,76 40.4,76 40.3,75.9 40.3,73.2 41,72.5 41,71.6 40.4,71 39.6,71 33.5,77.1 31.9,77.1 31.4,77.6 31.4,78.7 31.8,79.1 34.3,79.1 35,79.8 35,85.3 38.9,89.2

## Other copper
Top Layer:
  rectangle net VIN: 17.25,76.75 19.75,86.7
  rectangle net VIN: 17.25,84.25 23.75,86.75
  rectangle net GND_I: 20.25,72.25 23,82.25

## Silkscreen, mask and mechanical layers (free items; w line width, h text height)
Top Overlay:
  text "RaToPUS v0.3 / 48V/12V Isolated DC/DC Converter / March 2019, CERN, Geneva" at 50.7,4.9 h2
Mechanical 1:
  the board outline again, w0.254

## Text inside footprints (layer, text, board x,y; h text height)
J4: Top Overlay "1" at 3.515,83.89 h1.2 r90; Top Overlay "2" at 3.515,88.695 h1.2 r90; Mechanical 14 "1" at 3.515,83.89 h1.2 r90; Mechanical 14 "2" at 3.515,88.695 h1.2 r90
J5: Top Overlay "1" at 156.485,89.19 h1.2 r270; Top Overlay "2" at 156.485,84.385 h1.2 r270; Mechanical 14 "1" at 156.485,89.19 h1.2 r270; Mechanical 14 "2" at 156.485,84.385 h1.2 r270